# Altium PCB PCB1.PcbDoc
Units mm, origin at the board's own origin, x right, y up, seen from the top; angles counter-clockwise.
Board outline 152.65 x 102.36 mm, 2 copper layers (Top Layer, Bottom Layer); 71 components, 73 nets, 334 pads, 40 vias.
Unrouted connection lines stored in the file: 5.
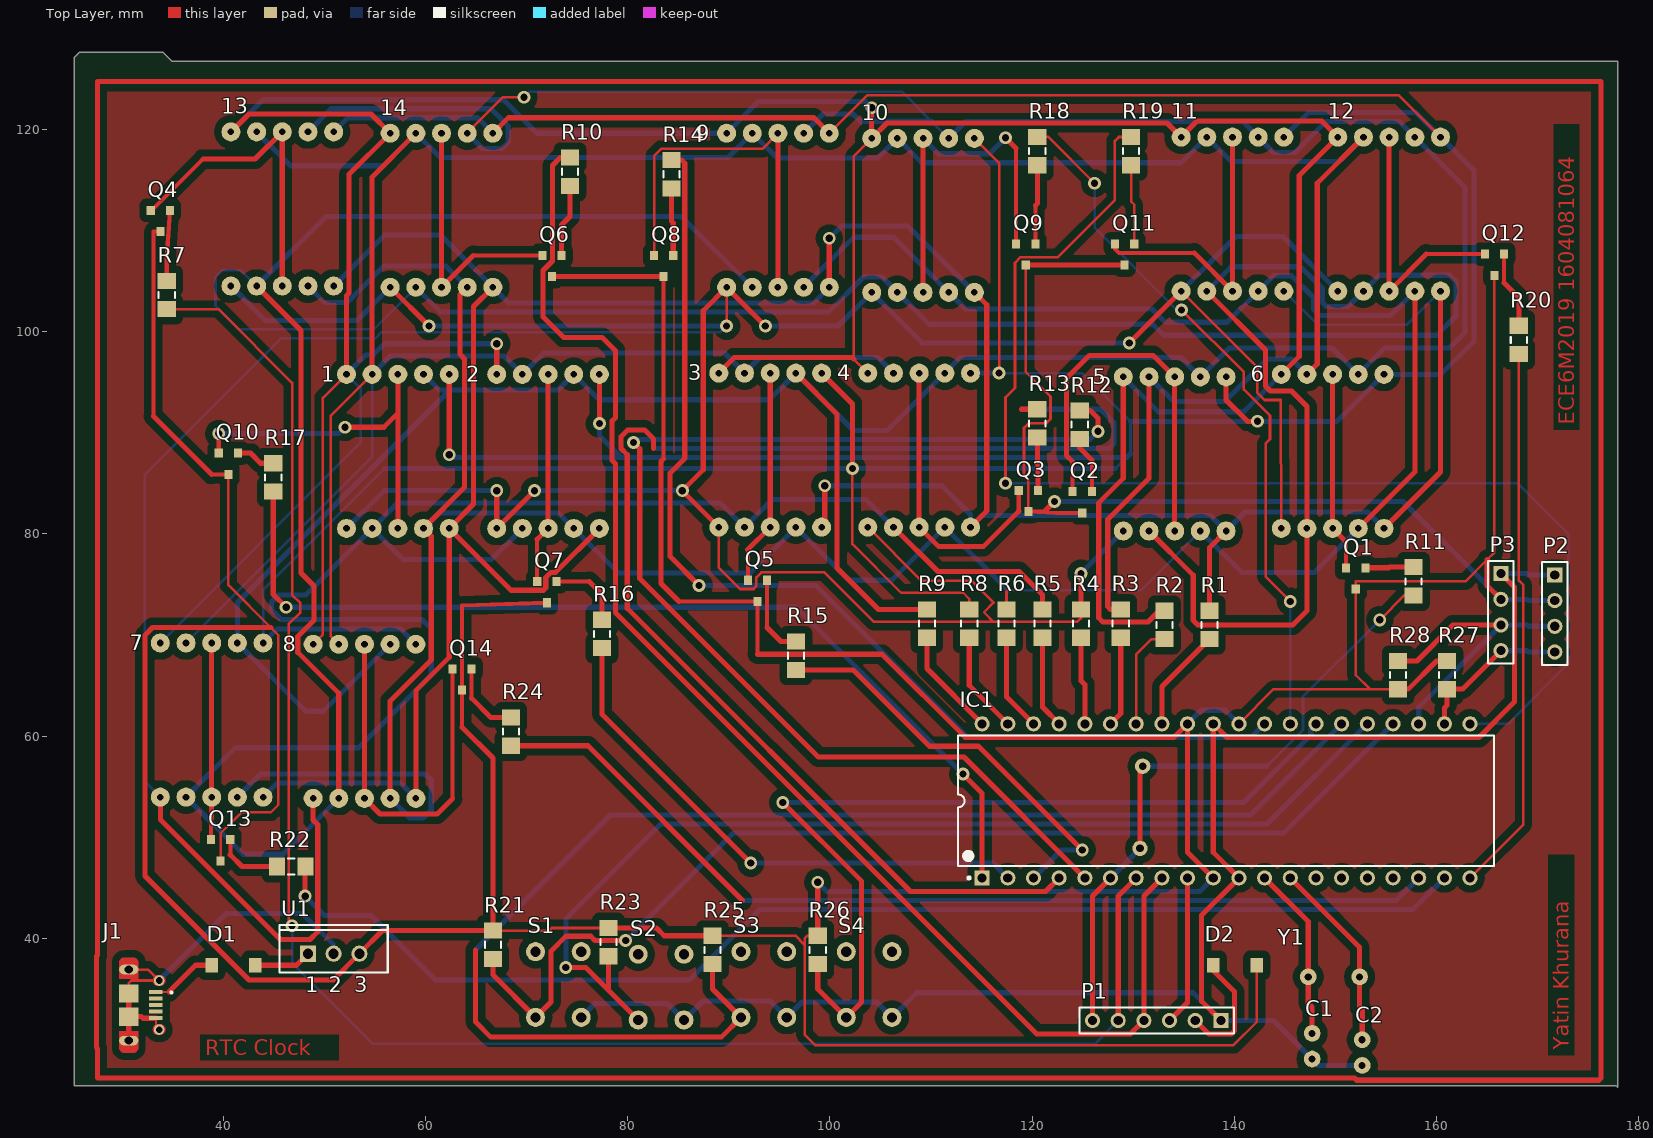
[diagram p0: Top Layer view]
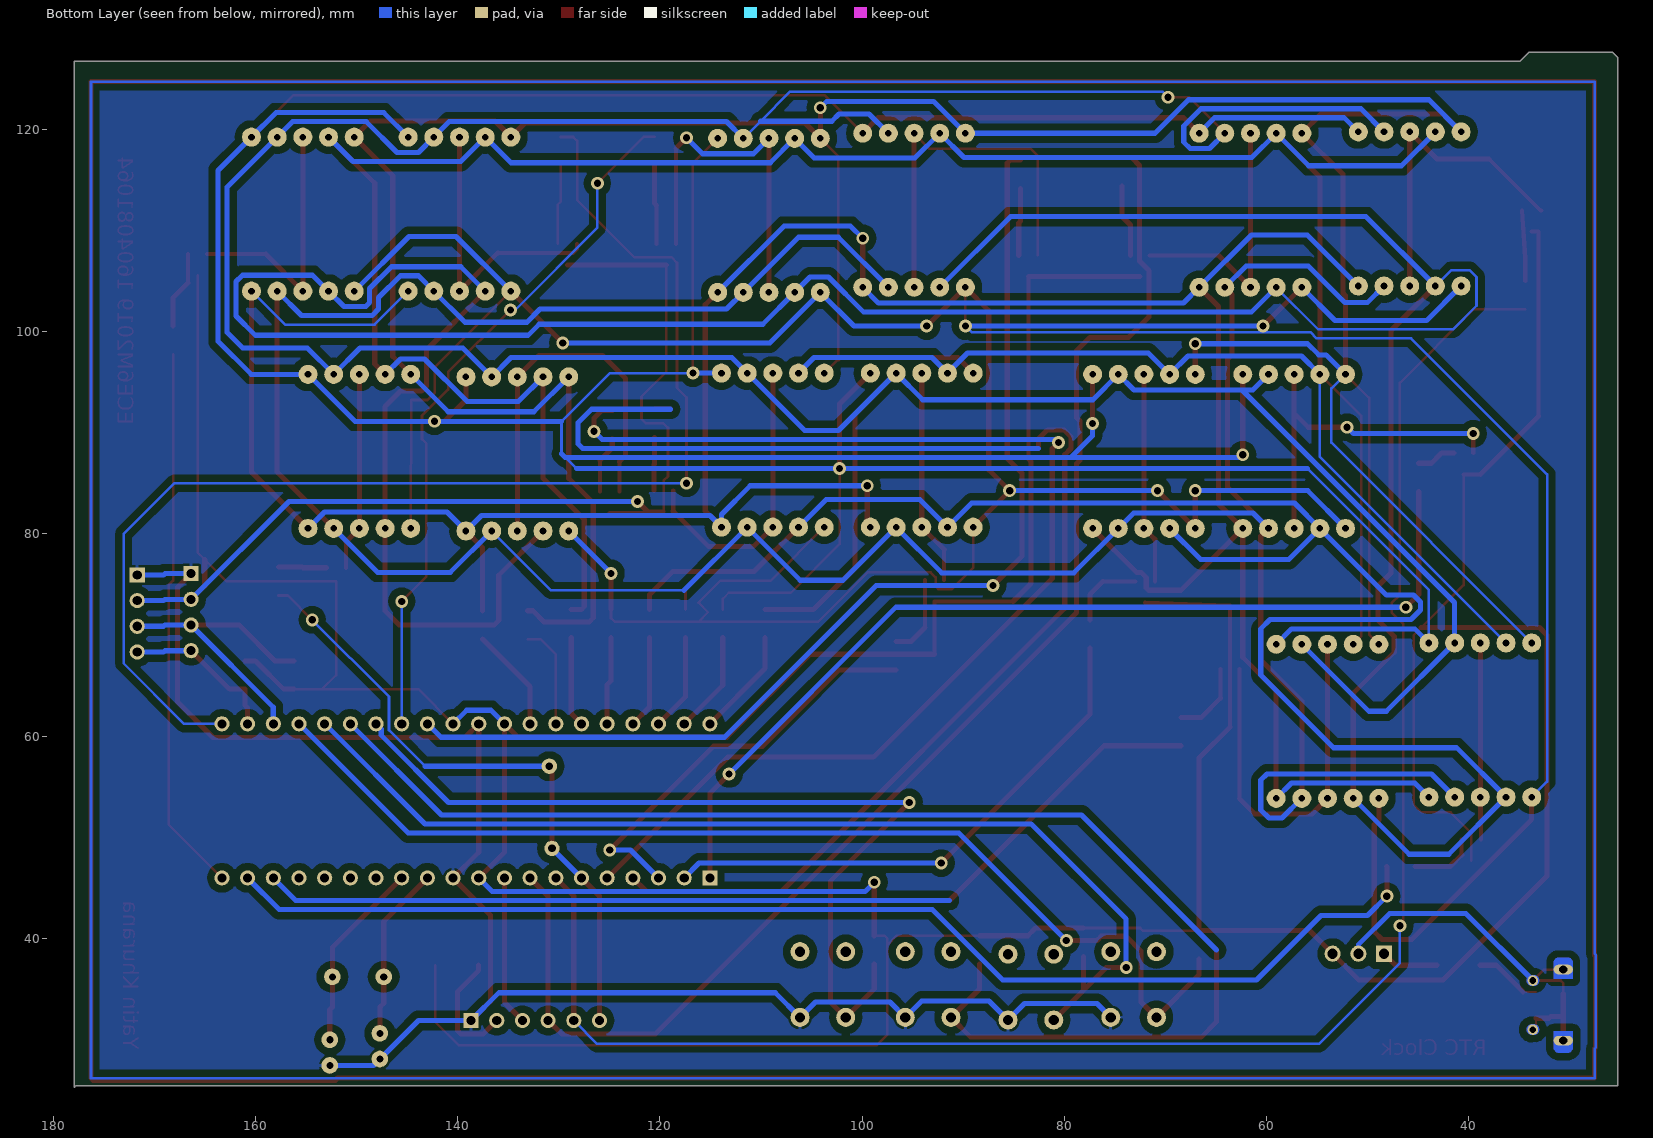
[diagram p1: Bottom Layer view, seen from below]

## Layer stack, top to bottom
Top Solder: solder mask 0.0102, Solder Resist, Dk 3.5
Top Layer: signal copper 0.0356
Dielectric 1: dielectric 0.32, FR-4, Dk 4.8
Bottom Layer: signal copper 0.0356
Bottom Solder: solder mask 0.0102, Solder Resist, Dk 3.5

## Board outline
25.273,127.127 25.273,25.4 177.8,25.4 177.927,25.273 177.927,126.746 34.925,126.746 34.036,127.635 25.781,127.635

## Design rules (kind name [scope] priority, off if disabled: settings)
Clearance [All] p1: gap=0.735 ignorepadtopadclearanceinfootprint=TRUE except(0: Arc-Hole Track-Hole SMDPad-Hole THPad-Hole Via-Hole Fill-Hole Poly-Hole Region-Hole Text-Hole; 0.025: Text-Text; 0.152: Arc-SMDPad Track-SMDPad; 0.254: Arc-Text Track-Text SMDPad-SMDPad SMDPad-THPad SMDPad-Via SMDPad-Text THPad-THPad THPad-Via THPad-Text Via-Via Via-Text Fill-Text Poly-Text Region-Text; 0.33: Arc-THPad Arc-Via Track-THPad Track-Via; 0.381: Arc-Arc Arc-Track Track-Track)
HoleSize [All] p1: absolutevalues=TRUE maxlimit=1 minlimit=0.7 maxpercent=80.000 minpercent=20.000
PolygonConnect [All] p1: connectstyle=Relief reliefconductorwidth=0.254 reliefentries=4 polygonreliefangle="90 Angle" airgapwidth=0.254
RoomDefinition RTC [InComponentClass('RTC')] p1: confinementstyle=ConfineIn formatcopy=TRUE lockcomponents=FALSE outline 27.555,26.311 176.272,26.311 176.272,124.863 27.555,124.863
RoutingVias [All] p1: holewidth=0.711 width=1.27 viastyle="Through Hole" minholewidth=0.711 minwidth=1.27 maxholewidth=0.711 maxwidth=1.27
SMDEntry [All] p1: side=TRUE corner=TRUE anyangle=FALSE
SMDNeckDown [All] p1: percent=50.000
SMDToCorner [All] p1: distance=10000
SMDToPlane [All] p1: distance=0
SolderMaskExpansion [All] p1: expansion=0.102
Width [All] p1: maxlimit=0.762 minlimit=0.127 preferedwidth=0.508
29 further rules are at their usual default settings.

## Components (designator, comment, footprint, x,y, rotation, side; value= is the part's Value field where it differs from the comment)
1 "7-SEGMENT-DISPLAYPTH" 7-SEGMENT-DISPLAY 57.273,88.16 r0 top
2 "7-SEGMENT-DISPLAYPTH" 7-SEGMENT-DISPLAY 72.132,88.16 r0 top
3 "7-SEGMENT-DISPLAYPTH" 7-SEGMENT-DISPLAY 94.103,88.287 r0 top
4 "7-SEGMENT-DISPLAYPTH" 7-SEGMENT-DISPLAY 108.835,88.287 r0 top
5 "7-SEGMENT-DISPLAYPTH" 7-SEGMENT-DISPLAY 134.108,87.906 r0 top
6 "7-SEGMENT-DISPLAYPTH" 7-SEGMENT-DISPLAY 149.729,88.16 r0 top
7 "7-SEGMENT-DISPLAYPTH" 7-SEGMENT-DISPLAY 38.862,61.592 r0 top
8 "7-SEGMENT-DISPLAYPTH" 7-SEGMENT-DISPLAY 53.975,61.465 r0 top
9 "7-SEGMENT-DISPLAYPTH" 7-SEGMENT-DISPLAY 94.869,112.011 r0 top
10 "7-SEGMENT-DISPLAYPTH" 7-SEGMENT-DISPLAY 109.22,111.503 r0 top
11 "7-SEGMENT-DISPLAYPTH" 7-SEGMENT-DISPLAY 139.827,111.63 r0 top
12 "7-SEGMENT-DISPLAYPTH" 7-SEGMENT-DISPLAY 155.321,111.63 r0 top
13 "7-SEGMENT-DISPLAYPTH" 7-SEGMENT-DISPLAY 45.847,112.138 r0 top
14 "7-SEGMENT-DISPLAYPTH" 7-SEGMENT-DISPLAY 61.595,112.011 r0 top
C1 "22PF-PTH-2.54MM-200V-5%" CAP-PTH-2.54 147.701,29.334 r90 top
C2 "22PF-PTH-2.54MM-200V-5%" CAP-PTH-2.54 152.654,28.699 r90 top
D1 "Schottky diode    A Schottky diode is a semiconductor diode which has a low forward voltage drop and a very fast switching action." SMA-DIODE 41.021,37.335 r0 top
D2 "Schottky diode    A Schottky diode is a semiconductor diode which has a low forward voltage drop and a very fast switching action." SMA-DIODE 140.081,37.335 r180 top
IC1 "MEGA32-P" 40P6 139.192,53.597 r90 top
J1 "SMD+DIP Micro USB; MICRO-B-SMD" HRS_ZX62D-B-5P8 30.734,33.401 r270 top
P1 "Programming Port" HDR1X6 138.684,31.874 r180 top
P2 "I2C" HDR1X4 171.704,75.943 r270 top
P3 "I2C" HDR1X4 166.37,76.07 r270 top
Q1 "NPN transistor    Current controlled devices typically used to amplify current or used as a switch.         BC547 -     COM-08928    (TO-92 45V 100mA) (1.Collector 2.Base 3.Emitter)             2N3904 -     COM-00521    (TO-92 40V 200mA) (1.Emitter 2.Base 3.Collector)             P2N2222A -     COM-12852    (TO-92 40V 600mA) (1.Collector 2.Base 3.Emitter)" SOT23-3 152.019,75.646 r180 top
Q2 "NPN transistor    Current controlled devices typically used to amplify current or used as a switch.         BC547 -     COM-08928    (TO-92 45V 100mA) (1.Collector 2.Base 3.Emitter)             2N3904 -     COM-00521    (TO-92 40V 200mA) (1.Emitter 2.Base 3.Collector)             P2N2222A -     COM-12852    (TO-92 40V 600mA) (1.Collector 2.Base 3.Emitter)" SOT23-3 124.968,83.182 r180 top
Q3 "NPN transistor    Current controlled devices typically used to amplify current or used as a switch.         BC547 -     COM-08928    (TO-92 45V 100mA) (1.Collector 2.Base 3.Emitter)             2N3904 -     COM-00521    (TO-92 40V 200mA) (1.Emitter 2.Base 3.Collector)             P2N2222A -     COM-12852    (TO-92 40V 600mA) (1.Collector 2.Base 3.Emitter)" SOT23-3 119.634,83.309 r180 top
Q4 "NPN transistor    Current controlled devices typically used to amplify current or used as a switch.         BC547 -     COM-08928    (TO-92 45V 100mA) (1.Collector 2.Base 3.Emitter)             2N3904 -     COM-00521    (TO-92 40V 200mA) (1.Emitter 2.Base 3.Collector)             P2N2222A -     COM-12852    (TO-92 40V 600mA) (1.Collector 2.Base 3.Emitter)" SOT23-3 33.782,110.995 r180 top
Q5 "NPN transistor    Current controlled devices typically used to amplify current or used as a switch.         BC547 -     COM-08928    (TO-92 45V 100mA) (1.Collector 2.Base 3.Emitter)             2N3904 -     COM-00521    (TO-92 40V 200mA) (1.Emitter 2.Base 3.Collector)             P2N2222A -     COM-12852    (TO-92 40V 600mA) (1.Collector 2.Base 3.Emitter)" SOT23-3 92.837,74.419 r180 top
Q6 "NPN transistor    Current controlled devices typically used to amplify current or used as a switch.         BC547 -     COM-08928    (TO-92 45V 100mA) (1.Collector 2.Base 3.Emitter)             2N3904 -     COM-00521    (TO-92 40V 200mA) (1.Emitter 2.Base 3.Collector)             P2N2222A -     COM-12852    (TO-92 40V 600mA) (1.Collector 2.Base 3.Emitter)" SOT23-3 72.517,106.55 r180 top
Q7 "NPN transistor    Current controlled devices typically used to amplify current or used as a switch.         BC547 -     COM-08928    (TO-92 45V 100mA) (1.Collector 2.Base 3.Emitter)             2N3904 -     COM-00521    (TO-92 40V 200mA) (1.Emitter 2.Base 3.Collector)             P2N2222A -     COM-12852    (TO-92 40V 600mA) (1.Collector 2.Base 3.Emitter)" SOT23-3 72.009,74.292 r180 top
Q8 "NPN transistor    Current controlled devices typically used to amplify current or used as a switch.         BC547 -     COM-08928    (TO-92 45V 100mA) (1.Collector 2.Base 3.Emitter)             2N3904 -     COM-00521    (TO-92 40V 200mA) (1.Emitter 2.Base 3.Collector)             P2N2222A -     COM-12852    (TO-92 40V 600mA) (1.Collector 2.Base 3.Emitter)" SOT23-3 83.566,106.55 r180 top
Q9 "NPN transistor    Current controlled devices typically used to amplify current or used as a switch.         BC547 -     COM-08928    (TO-92 45V 100mA) (1.Collector 2.Base 3.Emitter)             2N3904 -     COM-00521    (TO-92 40V 200mA) (1.Emitter 2.Base 3.Collector)             P2N2222A -     COM-12852    (TO-92 40V 600mA) (1.Collector 2.Base 3.Emitter)" SOT23-3 119.38,107.693 r180 top
Q10 "NPN transistor    Current controlled devices typically used to amplify current or used as a switch.         BC547 -     COM-08928    (TO-92 45V 100mA) (1.Collector 2.Base 3.Emitter)             2N3904 -     COM-00521    (TO-92 40V 200mA) (1.Emitter 2.Base 3.Collector)             P2N2222A -     COM-12852    (TO-92 40V 600mA) (1.Collector 2.Base 3.Emitter)" SOT23-3 40.513,86.992 r180 top
Q11 "NPN transistor    Current controlled devices typically used to amplify current or used as a switch.         BC547 -     COM-08928    (TO-92 45V 100mA) (1.Collector 2.Base 3.Emitter)             2N3904 -     COM-00521    (TO-92 40V 200mA) (1.Emitter 2.Base 3.Collector)             P2N2222A -     COM-12852    (TO-92 40V 600mA) (1.Collector 2.Base 3.Emitter)" SOT23-3 129.159,107.693 r180 top
Q12 "NPN transistor    Current controlled devices typically used to amplify current or used as a switch.         BC547 -     COM-08928    (TO-92 45V 100mA) (1.Collector 2.Base 3.Emitter)             2N3904 -     COM-00521    (TO-92 40V 200mA) (1.Emitter 2.Base 3.Collector)             P2N2222A -     COM-12852    (TO-92 40V 600mA) (1.Collector 2.Base 3.Emitter)" SOT23-3 165.735,106.677 r180 top
Q13 "NPN transistor    Current controlled devices typically used to amplify current or used as a switch.         BC547 -     COM-08928    (TO-92 45V 100mA) (1.Collector 2.Base 3.Emitter)             2N3904 -     COM-00521    (TO-92 40V 200mA) (1.Emitter 2.Base 3.Collector)             P2N2222A -     COM-12852    (TO-92 40V 600mA) (1.Collector 2.Base 3.Emitter)" SOT23-3 39.751,48.765 r180 top
Q14 "NPN transistor    Current controlled devices typically used to amplify current or used as a switch.         BC547 -     COM-08928    (TO-92 45V 100mA) (1.Collector 2.Base 3.Emitter)             2N3904 -     COM-00521    (TO-92 40V 200mA) (1.Emitter 2.Base 3.Collector)             P2N2222A -     COM-12852    (TO-92 40V 600mA) (1.Collector 2.Base 3.Emitter)" SOT23-3 63.627,65.656 r180 top
R1 "" 8-1206 137.541,70.996 r90 top
R2 "" 8-1206 133.096,70.996 r90 top
R3 "" 8-1206 128.778,71.123 r90 top
R4 "" 8-1206 124.841,71.123 r90 top
R5 "" 8-1206 121.031,71.123 r90 top
R6 "" 8-1206 117.475,71.123 r90 top
R7 "" 8-1206 34.417,103.629 r90 top
R8 "" 8-1206 113.792,71.123 r90 top
R9 "" 8-1206 109.601,71.123 r90 top
R10 "" 8-1206 74.295,115.818 r270 top
R11 "" 8-1206 157.734,75.311 r90 top
R12 "" 8-1206 124.714,90.802 r270 top
R13 "" 8-1206 120.523,90.929 r270 top
R14 "" 8-1206 84.328,115.57 r270 top
R15 "" 8-1206 96.647,67.951 r90 top
R16 "" 8-1206 77.47,70.101 r90 top
R17 "" 8-1206 44.958,85.595 r90 top
R18 "" 8-1206 120.523,117.862 r270 top
R19 "" 8-1206 129.794,117.859 r270 top
R20 "" 8-1206 168.148,99.19 r90 top
R21 "" 8-1206 66.675,39.367 r90 top
R22 "" 8-1206 46.736,47.114 r180 top
R23 "" 8-1206 78.105,39.621 r90 top
R24 "" 8-1206 68.453,60.446 r90 top
R25 "" 8-1206 88.392,38.859 r90 top
R26 "" 8-1206 98.806,38.859 r90 top
R27 "ERJP08J" 8-1206 161.036,66.043 r270 top
R28 "ERJP08J" 8-1206 156.21,66.043 r90 top
S1 "MOMENTARY-SWITCH-SPST-PTH-6.0MM-KIT" TACTILE_SWITCH_PTH_6.0MM_KIT 73.152,35.43 r90 top
S2 "MOMENTARY-SWITCH-SPST-PTH-6.0MM-KIT" TACTILE_SWITCH_PTH_6.0MM_KIT 83.312,35.176 r90 top
S3 "MOMENTARY-SWITCH-SPST-PTH-6.0MM-KIT" TACTILE_SWITCH_PTH_6.0MM_KIT 93.472,35.43 r90 top
S4 "MOMENTARY-SWITCH-SPST-PTH-6.0MM-KIT" TACTILE_SWITCH_PTH_6.0MM_KIT 103.886,35.43 r90 top
U1 "µA7805CKC" KC03 50.927,38.478 r0 top
Y1 "CRYSTAL-16MHZPTH-HC49US" HC49US 149.86,36.192 r180 top

## Footprints (in the part's own frame and the unit in brackets; to place one, negate y for a bottom-side part, rotate by r counter-clockwise, add the part's x,y. Pads: shape width x height; smd on the part's side, far side on the other; paste and mask are expansions set on the pad)
7-SEGMENT-DISPLAY [mil]
  round 74 hole 25.59: 1(-200,-300) 2(-100,-300) 3(0,-300) 4(100,-300) 5(200,-300) 6(200,300) 7(100,300) 8(0,300) 9(-100,300) 10(-200,300)
8-1206 [mm] "Chip Resistor; Body 3.1 x 1.6 mm (LxW typ)"
  rect 1.6x1.8 smd: 1(-1.4,0) 2(1.4,0)
  silkscreen extent -0.3,-0.8 0.3,0.8
40P6 [mm] "DIP, 40-Leads, Row Spacing 15.24mm, Pitch 2.54mm, Body 52.2x13.95mm"
  rect 1.5x1.5 hole 0.9: 1(-7.62,24.13)
  round 1.5 hole 0.9: 2(-7.62,21.59) 3(-7.62,19.05) 4(-7.62,16.51) 5(-7.62,13.97) 6(-7.62,11.43) 7(-7.62,8.89) 8(-7.62,6.35) 9(-7.62,3.81) 10(-7.62,1.27) 11(-7.62,-1.27) 12(-7.62,-3.81) 13(-7.62,-6.35) 14(-7.62,-8.89) 15(-7.62,-11.43) 16(-7.62,-13.97) 17(-7.62,-16.51) 18(-7.62,-19.05) 19(-7.62,-21.59) 20(-7.62,-24.13) 21(7.62,-24.13) 22(7.62,-21.59) 23(7.62,-19.05) 24(7.62,-16.51) 25(7.62,-13.97) 26(7.62,-11.43) 27(7.62,-8.89) 28(7.62,-6.35) 29(7.62,-3.81) 30(7.62,-1.27) 31(7.62,1.27) 32(7.62,3.81) 33(7.62,6.35) 34(7.62,8.89) 35(7.62,11.43) 36(7.62,13.97) 37(7.62,16.51) 38(7.62,19.05) 39(7.62,21.59) 40(7.62,24.13)
  silkscreen extent -7.74,-26.5 6.45,26.5, body extent -7.05,-26.47 7.05,26.47, height 4.83
CAP-PTH-2.54 [mil]
  round 65 hole 27.56: 1(-50,0) 2(50,0)
HC49US [mil]
  round 65 hole 27.56: 1(-100,0) 2(100,0)
HDR1X4 [mm] "Connector; Header; 4 Position"
  rect 1.5x1.5 hole 0.9: 1(0,0)
  round 1.5 hole 0.9: 2(2.54,0) 3(5.08,0) 4(7.62,0)
  silkscreen extent -1.27,-1.27 8.89,1.27
HDR1X6 [mm] "Connector; Header; 6 Position"
  rect 1.5x1.5 hole 0.9: 1(0,0)
  round 1.5 hole 0.9: 2(2.54,0) 3(5.08,0) 4(7.62,0) 5(10.16,0) 6(12.7,0)
  silkscreen extent -1.27,-1.27 13.97,1.27
HRS_ZX62D-B-5P8 [mm]
  rect 0.4x1.35 smd: 1(-1.3,2.6) 2(-0.65,2.6) 3(0,2.6) 4(0.65,2.6) 5(1.3,2.6)
  oval 0.95x1.9 hole 0.825: S(-3.513,-0.075) S(3.513,-0.075)
  round 1.05 hole 0.65: S(-2.425,2.925) S(2.425,2.925)
  rect 1.8x1.9 smd: S(-1.15,-0.075) S(1.15,-0.075)
  Top Layer region: -2.425,3.35 -2.425,3.55 -2.224,3.51 -2.054,3.396 -1.94,3.226 -1.9,3.025 -1.9,3.025 -1.9,2.825 -1.94,2.624 -2.054,2.454 -2.224,2.34 -2.425,2.3 -2.425,2.3 -2.425,2.5 -2.301,2.525 -2.195,2.595 -2.125,2.701 -2.1,2.825 -2.1,2.825 -2.1,3.025 -2.144,3.187 -2.262,3.306 -2.425,3.35
  Top Layer region: -2.425,2.5 -2.425,2.3 -2.626,2.34 -2.796,2.454 -2.91,2.624 -2.95,2.825 -2.95,2.825 -2.95,3.025 -2.91,3.226 -2.796,3.396 -2.626,3.51 -2.425,3.55 -2.425,3.55 -2.425,3.35 -2.549,3.325 -2.655,3.255 -2.725,3.149 -2.75,3.025 -2.75,3.025 -2.75,2.825 -2.706,2.663 -2.587,2.544 -2.425,2.5
  Top Layer region: 2.425,3.35 2.425,3.55 2.626,3.51 2.796,3.396 2.91,3.226 2.95,3.025 2.95,3.025 2.95,2.825 2.91,2.624 2.796,2.454 2.626,2.34 2.425,2.3 2.425,2.3 2.425,2.5 2.549,2.525 2.655,2.595 2.725,2.701 2.75,2.825 2.75,2.825 2.75,3.025 2.725,3.149 2.655,3.255 2.549,3.325 2.425,3.35
  Top Layer region: 2.425,2.5 2.425,2.3 2.224,2.34 2.054,2.454 1.94,2.624 1.9,2.825 1.9,2.825 1.9,3.025 1.94,3.226 2.054,3.396 2.224,3.51 2.425,3.55 2.425,3.55 2.425,3.35 2.262,3.306 2.144,3.187 2.1,3.025 2.1,3.025 2.1,2.825 2.125,2.701 2.195,2.595 2.301,2.525 2.425,2.5
  Top Layer region: -2.6,0.875 -4.2,0.875 -4.391,0.837 -4.554,0.729 -4.662,0.566 -4.7,0.375 -4.7,0.375 -4.7,-0.075 -3.925,-0.075 -3.925,0.375 -3.902,0.49 -3.837,0.587 -3.74,0.652 -3.625,0.675 -3.625,0.675 -3.4,0.675 -3.285,0.652 -3.188,0.587 -3.123,0.49 -3.1,0.375 -3.1,0.375 -3.1,-0.075 -2.6,-0.075
  Top Layer region: 2.6,-1.025 4.2,-1.025 4.391,-0.987 4.553,-0.879 4.662,-0.716 4.7,-0.525 4.7,-0.525 4.7,-0.075 3.925,-0.075 3.925,-0.525 3.902,-0.64 3.837,-0.737 3.74,-0.802 3.625,-0.825 3.625,-0.825 3.4,-0.825 3.285,-0.802 3.188,-0.737 3.123,-0.64 3.1,-0.525 3.1,-0.525 3.1,-0.075 2.6,-0.075
  Top Layer region: -3.1,-0.075 -2.6,-0.075 -2.6,-1.025 -4.2,-1.025 -4.391,-0.987 -4.553,-0.879 -4.662,-0.716 -4.7,-0.525 -4.7,-0.525 -4.7,-0.075 -3.925,-0.075 -3.925,-0.55 -3.904,-0.655 -3.844,-0.744 -3.755,-0.804 -3.65,-0.825 -3.65,-0.825 -3.4,-0.825 -3.285,-0.802 -3.188,-0.737 -3.123,-0.64 -3.1,-0.525 -3.1,-0.525
  Top Layer region: 3.1,-0.075 2.6,-0.075 2.6,0.875 4.2,0.875 4.391,0.837 4.554,0.729 4.662,0.566 4.7,0.375 4.7,0.375 4.7,-0.075 3.925,-0.075 3.925,0.4 3.904,0.505 3.844,0.594 3.755,0.654 3.65,0.675 3.65,0.675 3.4,0.675 3.285,0.652 3.188,0.587 3.123,0.49 3.1,0.375 3.1,0.375
  Bottom Layer region: -2.425,3.35 -2.425,3.55 -2.224,3.51 -2.054,3.396 -1.94,3.226 -1.9,3.025 -1.9,3.025 -1.9,2.825 -1.94,2.624 -2.054,2.454 -2.224,2.34 -2.425,2.3 -2.425,2.3 -2.425,2.5 -2.301,2.525 -2.195,2.595 -2.125,2.701 -2.1,2.825 -2.1,2.825 -2.1,3.025 -2.144,3.187 -2.262,3.306 -2.425,3.35
  Bottom Layer region: -2.425,2.5 -2.425,2.3 -2.626,2.34 -2.796,2.454 -2.91,2.624 -2.95,2.825 -2.95,2.825 -2.95,3.025 -2.91,3.226 -2.796,3.396 -2.626,3.51 -2.425,3.55 -2.425,3.55 -2.425,3.35 -2.549,3.325 -2.655,3.255 -2.725,3.149 -2.75,3.025 -2.75,3.025 -2.75,2.825 -2.706,2.663 -2.587,2.544 -2.425,2.5
  Bottom Layer region: 2.425,3.35 2.425,3.55 2.626,3.51 2.796,3.396 2.91,3.226 2.95,3.025 2.95,3.025 2.95,2.825 2.91,2.624 2.796,2.454 2.626,2.34 2.425,2.3 2.425,2.3 2.425,2.5 2.549,2.525 2.655,2.595 2.725,2.701 2.75,2.825 2.75,2.825 2.75,3.025 2.725,3.149 2.655,3.255 2.549,3.325 2.425,3.35
  Bottom Layer region: 2.425,2.5 2.425,2.3 2.224,2.34 2.054,2.454 1.94,2.624 1.9,2.825 1.9,2.825 1.9,3.025 1.94,3.226 2.054,3.396 2.224,3.51 2.425,3.55 2.425,3.55 2.425,3.35 2.262,3.306 2.144,3.187 2.1,3.025 2.1,3.025 2.1,2.825 2.125,2.701 2.195,2.595 2.301,2.525 2.425,2.5
  Bottom Layer region: -2.6,0.875 -4.2,0.875 -4.391,0.837 -4.554,0.729 -4.662,0.566 -4.7,0.375 -4.7,0.375 -4.7,-0.075 -3.925,-0.075 -3.925,0.375 -3.902,0.49 -3.837,0.587 -3.74,0.652 -3.625,0.675 -3.625,0.675 -3.4,0.675 -3.285,0.652 -3.188,0.587 -3.123,0.49 -3.1,0.375 -3.1,0.375 -3.1,-0.075 -2.6,-0.075
  Bottom Layer region: 2.6,-1.025 4.2,-1.025 4.391,-0.987 4.553,-0.879 4.662,-0.716 4.7,-0.525 4.7,-0.525 4.7,-0.075 3.925,-0.075 3.925,-0.525 3.902,-0.64 3.837,-0.737 3.74,-0.802 3.625,-0.825 3.625,-0.825 3.4,-0.825 3.285,-0.802 3.188,-0.737 3.123,-0.64 3.1,-0.525 3.1,-0.525 3.1,-0.075 2.6,-0.075
  Bottom Layer region: -3.1,-0.075 -2.6,-0.075 -2.6,-1.025 -4.2,-1.025 -4.391,-0.987 -4.553,-0.879 -4.662,-0.716 -4.7,-0.525 -4.7,-0.525 -4.7,-0.075 -3.925,-0.075 -3.925,-0.55 -3.904,-0.655 -3.844,-0.744 -3.755,-0.804 -3.65,-0.825 -3.65,-0.825 -3.4,-0.825 -3.285,-0.802 -3.188,-0.737 -3.123,-0.64 -3.1,-0.525 -3.1,-0.525
  Bottom Layer region: 3.1,-0.075 2.6,-0.075 2.6,0.875 4.2,0.875 4.391,0.837 4.554,0.729 4.662,0.566 4.7,0.375 4.7,0.375 4.7,-0.075 3.925,-0.075 3.925,0.4 3.904,0.505 3.844,0.594 3.755,0.654 3.65,0.675 3.65,0.675 3.4,0.675 3.285,0.652 3.188,0.587 3.123,0.49 3.1,0.375 3.1,0.375
  Mechanical 10 keep-out region: -3.75,0.875 3.75,0.875 3.75,1.925 -3.75,1.925
  Mechanical 10 keep-out region: -3.75,-1.525 3.75,-1.525 3.75,-1.025 -3.75,-1.025
  Mechanical 10 keep-out region: -2.6,-1.025 -2.05,-1.025 -2.05,0.875 -2.6,0.875
  Mechanical 10 keep-out region: -0.25,-1.025 0.25,-1.025 0.25,0.875 -0.25,0.875
  Mechanical 10 keep-out region: 2.05,-1.025 2.6,-1.025 2.6,0.875 2.05,0.875
  silkscreen extent -1.35,4.04 -1.15,4.24
KC03 [mm] "TO, Thru-Hole, Vertical, Heatsink Mounted; 3 In-Line Leads; Pitch 2.54 mm"
  rect 1.6x1.6 hole 1: 1(-2.54,0)
  round 1.6 hole 1: 2(0,0) 3(2.54,0)
  silkscreen extent -5.35,-1.85 5.35,2.85
SMA-DIODE [mm]
  rect 1.27x1.47 smd: A(-2.15,0) C(2.15,0)
SOT23-3 [mil]
  rect 31.5x35.43 smd: 1(-37.4,-39.37) 2(37.4,-39.37) 3(0,43.31)
TACTILE_SWITCH_PTH_6.0MM_KIT [mil]
  round 74 hole 40: 1(-128,89) 2(128,89) 3(-128,-89) 4(128,-89)

## Part data
D1 D2: library part DIODE-SCHOTTKY-SS14, PROD_ID=DIO-08053
IC1: "MICROCONTROLLER   32 Kbytes FLASH 2 Kbytes SRAM 1 Kbytes EEPROM USART 8-channel 10 bit ADC Source: www.atmel.com .. doc2503.pdf", MPN=ATMEGA32-16PU, OC_FARNELL=1661729, OC_NEWARK=51P1794
J1: library part ZX62D-B-5P8, Package=None, Availability=Unavailable, MF=Hirose, MP=ZX62D-B-5P8, Price=None
P1: library part "Header 6", "Header, 6-Pin", LatestRevisionDate=17-Jul-2002, LatestRevisionNote="Re-released for DXP Platform.", Publisher="Altium Limited"
P2 P3: library part "Header 4", "Header, 4-Pin", LatestRevisionDate=17-Jul-2002, LatestRevisionNote="Re-released for DXP Platform.", Publisher="Altium Limited"
Q1 Q2 Q3 Q4 Q5 Q6 Q7 Q8 Q9 Q10 Q11 Q12 Q13 Q14: library part TRANS_NPN-MMBT2222AL, PROD_ID=TRANS-08049
R1 R2 R3 R4 R5 R6 R7 R8 R9 R10 R11 R12 R13 R14 R15 R16 R17 R18 R19 R20 R21 R22 R23 R24 R25 R26: library part ERJP08J, "Anti-Surge Thick Film Chip Resistor, 10 Ohm to 1M Ohm Range, 5% Tolerance, 1206 Size, 0.25 W", PackageDocument=Mar-2003, Code_IPC="3216 [1206]", ComponentLink1Description="Manufacturer Link", ComponentLink1URL=http://www.panasonic.com/industrial/components/resistive_products.htm, ComponentLink2Description=Datasheet, ComponentLink2URL=http://www.panasonic.com/industrial/components/pdf/AOA0000CE4.pdf, LatestRevisionDate=19-Mar-2004, LatestRevisionNote="Silkscreen size reduced.", Note="If flow soldering, adjust pad width of PCB Footprint to 0.7 - 0.8 times the width of the resistor.", PackageReference=8-1206, Published=17-Dec-2003, Publisher="Altium Limited"
R27 R28: "Anti-Surge Thick Film Chip Resistor, 10 Ohm to 1M Ohm Range, 5% Tolerance, 1206 Size, 0.25 W", PackageDocument=Mar-2003, Code_IPC="3216 [1206]", ComponentLink1Description="Manufacturer Link", ComponentLink1URL=http://www.panasonic.com/industrial/components/resistive_products.htm, ComponentLink2Description=Datasheet, ComponentLink2URL=http://www.panasonic.com/industrial/components/pdf/AOA0000CE4.pdf, LatestRevisionDate=19-Mar-2004, LatestRevisionNote="Silkscreen size reduced.", Note="If flow soldering, adjust pad width of PCB Footprint to 0.7 - 0.8 times the width of the resistor.", PackageReference=8-1206, Published=17-Dec-2003, Publisher="Altium Limited"
U1: "Positive-Voltage Regulator", ComponentLink1Description="Manufacturer Link", ComponentLink1URL=http://www.ti.com/, ComponentLink2Description=Datasheet, ComponentLink2URL=http://www-s.ti.com/sc/ds/ua7805.pdf, DatasheetVersion=Jul-1999, Note="Pin 2 is electrically connected to TAB.", PackageDescription="TO, Thru-Hole, Vertical, Heatsink Mounted; 3 In-Line Leads; Pitch 2.54 mm", PackageReference=KC03, PackageVersion=Sep-1995, Published=15-Apr-2002, Publisher="Altium Limited"
C1 C2: PROD_ID=CAP-09128
S1 S2 S3 S4: PROD_ID=SWCH-08441, SF_SKU=COM-00097
Y1: PROD_ID=XTAL-08181, SF_ID=COM-00536

## Free pads (board coordinates)
  round 1.524 hole 0.762: 5(130.68,48.895) 6(130.937,57.023)

## Via types
v1: diameter 1.27, hole 0.711, Top Layer to Bottom Layer, 40 vias

## Nets (pads, with @x,y where several pads share a name; then routed paths per layer and width w, separated by ;. In a path a pad name is that pad's centre, name@x,y a point inside that pad or via, vN(x,y) a via of type N, cw(c..) or ccw(c..) an arc to the next point about the centre after c; other vN are vias at no path point)
+5V: D2.A IC1.10 IC1.30 IC1.32 P2.2 P3.2 Q1.3 Q2.3 Q3.3 Q4.3 Q5.3 Q6.3 Q7.3 Q8.3 Q9.3 Q10.3 Q11.3 Q12.3 Q13.3 Q14.3 R21.2 R23.2 R25.2 R26.2 R27.1 R28.1 U1.3 | length 638.2
  Top Layer w0.254: Q13.3 39.751,50.394 41.808,52.451 44.704,52.451 45.466,53.213 45.466,69.977 44.704,70.739 40.513,74.93 Q10.3 ; R21.2 72.263,40.767 72.517,41.021 R23.2 ; R25.2 96.596,40.259 97.511,39.345 ; R26.2 97.79,40.259 97.511,39.979 97.511,39.345 ; Q9.3 119.38,96.023 121.829,93.574 121.829,91.381 121.412,90.964 119.679,90.964 119.202,90.487 119.202,85.7 119.634,85.268 Q3.3 ; IC1.30 143.888,64.643 153.416,64.643 ; D2.A 142.231,31.75 139.92,29.439 98.552,29.439 97.511,30.48 97.511,39.345 ; R28.1 153.416,64.643 ; Q12.3 165.735,78.181 165.024,77.47 162.865,75.311 152.019,75.311 Q1.3 152.019,66.04 153.416,64.643
  Top Layer w0.4: 33.096,91.643 33.096,109.895 Q4.3 ; 38.848,85.892 Q10.3 ; 63.627,60.884 Q14.3 63.627,72.898 Q7.3 ; 83.566,87.431 Q8.3 ; 85.09,73.319 Q5.3 92.837,68.123 ; 121.223,82.209 Q3.3 122.352,82.082 Q2.3
  Top Layer w0.508: 33.096,91.643 38.848,85.892 ; 44.704,70.739 33.02,70.739 32.258,69.977 32.258,46.177 42.545,35.89 50.879,35.89 U1.3 55.756,40.767 R21.2 66.675,57.836 63.627,60.884 ; Q6.3 Q8.3 ; R23.2 82.855,41.021 83.617,40.259 R25.2 ; 83.566,87.431 83.305,87.171 83.305,75.104 85.09,73.319 ; 92.837,68.123 92.862,68.097 105.171,68.097 113.386,59.883 134.048,59.883 IC1.32 135.382,48.517 IC1.10 ; R26.2 v1(98.806,45.542) ; Q9.3 Q11.3 ; 121.223,82.209 v1(122.225,83.21) ; R28.1 157.201,64.643 160.001,67.443 R27.1 ; 165.024,77.47 165.024,74.876 P3.2
  Bottom Layer w0.508: v1(98.806,45.542) 99.705,44.643 136.588,44.643 IC1.10 ; v1(122.225,83.21) 156.69,83.21 P3.2 168.961,73.53 169.088,73.403 P2.2 ; IC1.32 136.725,62.56 139.119,62.56 IC1.30
GND: C1.1 C2.1 IC1.11 IC1.31 P1.1 P2.1 P3.1 S1.3 S2.3 S3.3 S4.3 | length 168.3
  Top Layer w0.508: P1.1 136.779,33.779 136.779,42.294 IC1.11 137.922,48.517 IC1.31 139.271,59.868 164.211,59.868 167.704,63.361 167.704,74.736 P3.1
  Bottom Layer w0.508: S1.3 76.787,33.553 83.944,33.553 S2.3 87.455,33.807 94.104,33.807 S3.3 97.26,33.706 104.62,33.706 S4.3 108.588,34.62 135.938,34.62 P1.1 143.891,31.874 C1.1 148.336,27.429 C2.1 ; P3.1 168.961,76.07 169.088,75.943 P2.1
Net1_1: 1.1 2.1 3.1 4.1 5.1 6.1 7.1 8.1 9.1 10.1 11.1 12.1 13.1 14.1 R4.2 | length 430.1
  Top Layer w0.254: 3.1 89.023,76.648 91.123,74.549 92.456,74.549 92.735,74.828 92.735,75.692 93.243,76.2 99.466,76.2 104.369,71.298 116.205,71.298 ; v1(89.789,100.559) 9.1 ; 4.1 109.035,75.387 114.021,75.387 116.205,73.203 115.252,72.25 116.205,71.298 ; R4.2 124.841,71.679 124.46,71.298 116.205,71.298 ; 11.1 142.263,96.494 142.263,93.98 143,93.243 144.591,93.243 6.1
  Top Layer w0.508: 7.1 33.782,51.74 45.644,39.878 48.59,39.878 49.352,40.64 49.352,51.257 48.895,51.714 8.1 ; 14.1 v1(60.347,100.559) ; v1(67.052,84.277) 2.1 v1(70.789,84.277) ; 3.1 v1(85.413,84.277) 87.478,86.341 87.478,102.08 9.1 v1(93.621,100.559) ; R4.2 v1(124.841,76.099) ; v1(129.619,98.882) 11.1
  Bottom Layer w0.254: 7.1 32.258,55.496 32.258,85.877 45.72,99.339 55.067,99.339 55.677,99.949 89.179,99.949 v1(89.789,100.559)
  Bottom Layer w0.508: 13.1 44.168,101.117 53.241,101.117 14.1 ; 1.1 55.93,84.277 v1(67.052,84.277) ; v1(60.347,100.559) v1(89.789,100.559) ; v1(70.789,84.277) v1(85.413,84.277) ; v1(93.621,100.559) 100.816,100.559 10.1 109.141,98.882 v1(129.619,98.882) ; v1(124.841,76.099) 5.1 ; 11.1 140.16,109.423 144.828,109.423 12.1
Net1_2: 1.2 2.2 3.2 4.2 5.2 6.2 7.2 8.2 9.2 10.2 11.2 12.2 13.2 14.2 R5.2 | length 517.8
  Top Layer w0.508: 13.2 47.701,100.124 47.701,76.124 48.971,74.854 48.971,71.45 47.371,69.85 47.371,68.301 51.435,64.237 8.2 ; 4.2 110.686,76.276 118.745,76.276 121.031,73.99 R5.2 ; 5.2 135.941,75.914 135.941,71.438 136.385,70.993 145.792,70.993 147.189,72.39 6.2 147.189,92.612 145.669,94.132 143.586,94.132 143.104,94.615 143.104,98.193 11.2
  Bottom Layer w0.254: 13.2 41.729,106.096 39.929,106.096 39.243,105.41 39.243,102.565 41.58,100.228 54.892,100.228 14.2
  Bottom Layer w0.508: 13.2 50.168,111.379 85.341,111.379 9.2 ; 8.2 45.901,48.311 41.983,48.311 7.2 41.202,58.852 53.391,58.852 60.579,66.04 60.579,70.612 59.665,71.526 45.72,71.526 44.767,72.479 44.767,73.266 45.466,73.965 48.158,73.965 1.2 ; 14.2 61.516,101.93 99.847,101.93 103.327,105.41 105.153,105.41 10.2 109.826,100.737 131.944,100.737 133.037,99.644 160.02,99.644 161.925,101.549 161.925,104.953 161.29,105.588 154.359,105.588 12.2 151.257,102.486 149.101,102.486 148.717,102.87 148.717,104.267 146.558,106.426 139.703,106.426 11.2 ; 2.2 66.522,77.47 57.804,77.47 1.2 ; 4.2 103.574,83.388 94.284,83.388 3.2 89.173,83.058 57.251,83.058 1.2
Net1_3: 1.3 1.8 Q10.2 | length 35.7
  Top Layer w0.4: Q10.2 v1(39.563,89.916)
  Top Layer w0.508: v1(52.045,90.551) 55.88,90.551 57.273,91.944 ; 1.3 57.273,91.944 ; 1.8 57.273,91.944
  Bottom Layer w0.508: v1(39.563,89.916) 51.41,89.916 v1(52.045,90.551)
Net1_4: 1.4 2.4 3.4 4.4 5.4 6.4 7.4 8.4 9.4 10.4 11.4 12.4 13.4 14.4 R6.2 | length 311.3
  Top Layer w0.254: R6.2 117.475,74.276 117.621,74.422
  Top Layer w0.508: 8.4 56.515,63.475 60.579,67.539 60.579,79.775 1.4 63.877,84.604 63.877,97.307 63.424,97.761 63.424,103.68 14.4 ; 6.4 157.861,86.132 12.4
  Bottom Layer w0.254: 117.621,74.422 130.784,74.422 5.4
  Bottom Layer w0.508: 7.4 43.691,56.261 59.969,56.261 60.579,55.651 60.579,52.705 59.766,51.892 58.468,51.892 8.4 ; 13.4 50.035,102.87 52.239,102.87 55.88,106.511 62.015,106.511 14.4 ; 1.4 61.34,82.067 73.145,82.067 2.4 79.063,76.149 92.125,76.149 3.4 101.898,75.413 106.121,75.413 4.4 117.621,74.422 ; 9.4 102.365,109.347 106.296,109.347 10.4 113.408,102.235 131.868,102.235 133.164,100.94 139.297,100.94 11.4 143.894,105.537 145.666,105.537 147.828,103.375 147.828,102.235 148.466,101.597 155.448,101.597 12.4 ; 5.4 140.735,76.2 147.929,76.2 6.4
Net1_5: 1.5 2.5 3.5 4.5 5.5 6.5 7.5 8.5 9.5 10.5 11.5 12.5 13.5 14.5 R1.2 | length 309
  Top Layer w0.508: 8.5 59.055,64.494 62.353,67.793 1.5 ; 14.5 64.766,102.482 64.766,82.953 1.5 ; 2.5 72.872,76.2 72.415,76.2 71.907,75.692 71.907,74.676 71.653,74.422 68.472,74.422 1.5 ; 3.5 99.492,80.976 v1(99.492,84.76) ; 9.5 v1(99.949,109.245) ; 4.5 115.519,82.271 115.519,102.664 10.5 ; R1.2 137.541,78.639 5.5 ; 6.5 160.401,86.132 12.5
  Bottom Layer w0.254: 11.5 148.226,100.691 157.082,100.691 12.5
  Bottom Layer w0.508: 7.5 45.342,55.372 57.528,55.372 8.5 ; 13.5 55.985,109.576 61.49,109.576 14.5 68.221,102.845 98.403,102.845 9.5 ; v1(99.492,84.76) 111.071,84.76 113.915,81.915 4.5 115.061,81.813 137.661,81.813 5.5 141.071,82.169 153.181,82.169 6.5 ; v1(99.949,109.245) 101.143,110.439 107.744,110.439 10.5
Net1_6: 1.6 2.6 3.6 4.6 5.6 6.6 7.6 8.6 9.6 10.6 11.6 12.6 13.6 14.6 R8.2 | length 473.2
  Top Layer w0.254: 9.6 103.686,123.368 156.283,123.368 12.6 ; v1(102.233,86.462) 102.233,78.996 107.048,74.181 113.195,74.181 113.792,73.584 R8.2 ; 10.6 116.738,116.685 v1(116.738,95.907)
  Top Layer w0.508: v1(62.353,87.833) 1.6 ; 14.6 68.202,121.158 98.422,121.158 9.6 ; v1(77.212,90.907) 2.6 ; 3.6 102.233,92.857 v1(102.233,86.462) ; 5.6 139.188,93.247 141.3,91.135 v1(142.309,91.135)
  Bottom Layer w0.254: 7.6 43.942,74.444 55.959,86.462 ; v1(116.738,95.907) 124.963,95.907 129.736,91.135 129.736,87.927 ; 128.27,86.462 129.362,87.554
  Bottom Layer w0.508: 7.6 45.342,70.612 57.528,70.612 8.6 ; 13.6 52.327,121.158 65.148,121.158 14.6 ; 55.959,86.462 v1(102.233,86.462) 128.27,86.462 ; v1(62.353,87.833) 62.633,87.554 79.368,87.554 ; v1(77.212,90.907) 77.212,89.71 79.368,87.554 ; 4.6 v1(116.738,95.907) ; 129.736,87.927 129.362,87.554 79.368,87.554 ; 129.736,91.135 v1(142.309,91.135) 150.164,91.135 6.6 160.423,95.78 163.703,99.06 163.703,115.948 12.6 157.988,121.663 147.32,121.663 11.6
Net1_7: 1.7 2.7 3.7 4.7 5.7 6.7 7.7 8.7 9.7 10.7 11.7 12.7 13.7 14.7 R9.2 | length 366.8
  Top Layer w0.254: 14.7 67.694,123.19 v1(69.748,123.19)
  Top Layer w0.508: 3.7 100.711,91.84 100.711,76.632 104.82,72.523 R9.2
  Bottom Layer w0.254: v1(69.748,123.19) 70.307,123.749 107.134,123.749 110.073,120.81 10.7
  Bottom Layer w0.508: 13.7 50.676,122.047 66.497,122.047 68.199,120.345 68.199,118.745 67.561,118.107 65.659,118.107 14.7 ; 8.7 49.889,62.459 48.155,62.459 7.7 41.402,73.203 62.433,94.234 ; 1.7 61.36,94.234 62.433,94.234 ; 9.7 99.314,121.536 102.286,121.536 103.011,120.81 110.073,120.81 ; 10.7 113.414,120.777 140.84,120.777 11.7 143.891,117.726 145.996,117.726 149.044,120.774 156.337,120.774 12.7 162.814,114.297 162.814,99.949 161.265,98.4 154.889,98.4 6.7 149.675,98.374 139.496,98.374 5.7 134.74,97.434 112.902,97.434 4.7 105.689,90.221 102.33,90.221 3.7 94.005,93.269 77.184,93.269 2.7 73.126,94.234 62.433,94.234
Net1_9: 1.9 2.9 3.9 4.9 5.9 6.9 7.9 8.9 9.9 10.9 11.9 12.9 13.9 14.9 R3.2 | length 335.2
  Top Layer w0.254: 8.9 50.648,69.872 50.648,91.695 1.9
  Top Layer w0.508: 1.9 54.733,115.309 14.9 ; R3.2 127.762,72.523 127.483,72.802 127.483,81.414 131.568,85.499 5.9 ; 6.9 148.209,96.8 148.209,114.678 12.9
  Bottom Layer w0.254: 7.9 54.733,87.623 1.9
  Bottom Layer w0.508: 13.9 46.657,116.408 55.832,116.408 14.9 61.468,117.218 89.916,117.218 9.9 94.764,117.196 104.753,117.196 10.9 109.093,116.71 134.747,116.71 11.9 139.7,116.837 150.368,116.837 12.9 ; 1.9 56.54,97.587 67.786,97.587 2.9 71.704,97.892 89.579,97.892 3.9 93.09,97.434 104.768,97.434 4.9 ; 5.9 133.981,93.113 139.087,93.113 143.281,97.307 145.662,97.307 6.9
Net1_10: 1.10 2.10 3.10 4.10 5.10 6.10 7.10 8.10 9.10 10.10 11.10 12.10 13.10 14.10 R2.2 | length 359.6
  Top Layer w0.254: 8.10 49.86,70.05 49.86,93.447 1.10 ; 4.10 102.362,97.301 102.362,117.345 10.10
  Top Layer w0.508: 13.10 42.548,121.539 54.607,121.539 14.10 52.451,115.567 52.451,103.813 52.193,103.556 1.10 ; 2.10 v1(67.052,98.806) ; 3.10 90.55,97.434 102.228,97.434 102.362,97.301 ; v1(104.14,122.149) 10.10 105.667,120.65 133.347,120.65 11.10 136.325,120.828 148.663,120.828 12.10 146.431,115.44 146.431,97.562 6.10 ; 5.10 129.028,85.508 126.594,83.073 126.594,71.704 127,71.298 131.47,71.298 132.569,72.396 R2.2
  Bottom Layer w0.254: 7.10 53.594,89.024 53.594,94.38 1.10
  Bottom Layer w0.508: 13.10 43.945,122.936 67.73,122.936 71.035,119.631 9.10 92.942,122.784 103.505,122.784 v1(104.14,122.149) ; 1.10 54.126,97.713 54.852,97.713 55.945,98.806 v1(67.052,98.806) ; 5.10 132.479,92.076 140.945,92.076 6.10
Net2_3: 2.3 2.8 Q7.2 | length 20.9
  Top Layer w0.4: Q7.2 71.059,79.467
  Top Layer w0.508: 71.059,79.467 2.3 2.8
Net3_3: 3.3 3.8 Q5.2 | length 21.4
  Top Layer w0.4: Q5.2 91.887,78.451
  Top Layer w0.508: 91.887,78.451 3.3 3.8
Net4_3: 4.3 4.8 Q3.2 | length 29.4
  Top Layer w0.4: 118.684,82.242 Q3.2
  Top Layer w0.508: 4.8 4.3 110.763,78.74 115.182,78.74 118.684,82.242
Net5_3: 5.3 5.8 Q2.2 | length 39.2
  Top Layer w0.4: Q2.2 124.018,87.132
  Top Layer w0.508: 124.018,87.132 123.393,87.757 123.393,95.377 125.679,97.663 131.972,97.663 5.8 5.3
Net6_3: 6.3 6.8 Q1.2 | length 19.7
  Top Layer w0.4: Q1.2 151.069,79.201
  Top Layer w0.508: 6.8 6.3 151.069,79.201
Net7_3: 7.3 7.8 Q13.2 | length 19.5
  Top Layer w0.4: Q13.2 38.801,51.816
  Top Layer w0.508: 38.801,51.816 38.862,51.877 7.3 7.8
Net8_3: 8.3 8.8 Q14.2 | length 38.1
  Top Layer w0.4: 62.677,53.812 Q14.2
  Top Layer w0.508: 8.8 8.3 55.521,52.299 61.163,52.299 62.677,53.812
Net9_3: 9.3 9.8 Q8.2 | length 38.3
  Top Layer w0.254: Q8.2 82.616,117.389 83.312,118.085 93.323,118.085 9.8
  Top Layer w0.508: 9.3 9.8
Net10_3: 10.3 10.8 Q9.2 | length 35.6
  Top Layer w0.4: Q9.2 118.43,118.12
  Top Layer w0.508: 10.3 10.8 ; v1(117.373,119.177) 118.43,118.12
  Bottom Layer w0.508: 10.8 110.744,117.599 115.796,117.599 v1(117.373,119.177)
Net11_3: 11.3 11.8 Q11.2 | length 29.1
  Top Layer w0.4: Q11.2 128.209,108.176 128.588,107.798 136.039,107.798
  Top Layer w0.508: 136.039,107.798 11.3 11.8
Net12_3: 12.3 12.8 Q12.2 | length 26.2
  Top Layer w0.4: 158.988,107.677 Q12.2
  Top Layer w0.508: 12.8 12.3 158.988,107.677
Net13_3: 13.3 13.8 Q4.2 | length 31.5
  Top Layer w0.4: Q4.2 32.918,111.995 37.992,117.069
  Top Layer w0.508: 37.992,117.069 43.158,117.069 13.8 13.3
Net14_3: 14.3 14.8 Q6.2 | length 26.5
  Top Layer w0.4: 64.754,107.55 Q6.2
  Top Layer w0.508: 14.8 14.3 64.754,107.55
NetC1_2: C1.2 IC1.12 Y1.2 | length 17.3
  Top Layer w0.508: IC1.12 147.32,41.659 Y1.2 147.32,33.579 147.701,33.198 C1.2
NetC2_2: C2.2 IC1.13 Y1.1 | length 19
  Top Layer w0.508: IC1.13 152.4,39.119 Y1.1 152.4,33.198 152.654,32.944 C2.2
NetD1_A: D1.A J1.1 | length 6.6
  Top Layer w0.2: J1.1 34.62,34.701
  Top Layer w0.5: 34.62,34.701 37.254,37.335
  Top Layer w0.508: 37.254,37.335 D1.A
NetD1_C: D1.C U1.1 | length 5.7
  Top Layer w0.508: D1.C 47.244,37.335 U1.1
NetD2_C: D2.C P1.2 | length 11.9
  Top Layer w0.508: P1.2 137.487,30.531 139.7,30.531 140.03,30.861 140.03,34.722 137.931,36.821 D2.C
NetIC1_1: IC1.1 R17.1 | length 96.8
  Top Layer w0.508: R17.1 44.958,74.016 v1(46.228,72.746) ; v1(113.157,56.261) 115.062,54.356 IC1.1
  Bottom Layer w0.508: v1(46.228,72.746) 96.672,72.746 v1(113.157,56.261)
NetIC1_2: IC1.2 R16.1 | length 53.4
  Top Layer w0.508: R16.1 77.47,62.154 v1(92.177,47.447)
  Bottom Layer w0.508: v1(92.177,47.447) 116.132,47.447 IC1.2
NetIC1_3: IC1.3 R15.1 | length 41.7
  Top Layer w0.508: R15.1 102.308,66.551 109.865,58.994 114.717,58.994 v1(124.968,48.743)
  Bottom Layer w0.508: IC1.3 122.908,48.743 v1(124.968,48.743)
NetIC1_4: IC1.4 R13.1 | length 136
  Top Layer w0.508: 82.575,88.443 82.575,89.383 81.686,90.272 80.01,90.272 79.35,89.611 79.35,88.443 79.959,87.833 79.959,72.644 107.975,44.628 121.333,44.628 IC1.4 ; 118.948,92.329 R13.1
  Bottom Layer w0.508: 82.575,88.443 127.635,88.443 128.092,88.9 128.092,91.008 126.772,92.329 118.948,92.329
NetIC1_5: IC1.5 R12.1 | length 119.8
  Top Layer w0.508: v1(80.569,89.052) 81.204,88.417 81.204,75.59 98.866,57.928 113.271,57.928 IC1.5 ; R12.1 125.756,92.202 126.517,91.44 v1(126.517,90.145)
  Bottom Layer w0.508: v1(80.569,89.052) 80.848,89.332 125.705,89.332 v1(126.517,90.145)
NetIC1_6: IC1.6 P1.6 pad.5 pad.6 R11.1 | length 62.9
  Top Layer w0.254: pad.6@130.68,56.766 pad.6 ; v1(154.399,71.501) 156.809,73.911 R11.1
  Top Layer w0.508: P1.6 125.984,44.199 IC1.6 ; pad.5 pad.6@130.68,56.766
  Bottom Layer w0.254: 143.235,57.023 146.801,60.59 146.801,63.904 v1(154.399,71.501)
  Bottom Layer w0.508: IC1.6 pad.5 ; pad.6 143.235,57.023
NetIC1_7: IC1.7 P1.5 R7.1 | length 174.6
  Top Layer w0.254: R7.1 39.528,102.229 46.812,94.945 46.812,73.965 47.625,73.152 47.625,72.238 46.482,71.095 46.482,41.58 v1(46.812,41.25)
  Top Layer w0.508: P1.5 128.524,44.199 IC1.7
  Bottom Layer w0.254: v1(46.812,41.25) 46.812,37.579 54.826,29.566 126.216,29.566 P1.5
NetIC1_8: IC1.8 P1.4 R10.1 | length 137.1
  Top Layer w0.508: R10.1 73.343,117.218 72.568,116.443 72.568,106.998 71.628,106.058 71.628,101.473 73.66,99.441 77.47,99.441 78.791,98.12 78.791,91.491 78.461,91.161 78.461,87.274 78.791,86.944 78.791,72.21 120.47,30.531 129.721,30.531 P1.4 131.064,44.199 IC1.8
NetIC1_9: IC1.9 P1.3 | length 14.8
  Top Layer w0.508: P1.3 135.382,33.652 IC1.9
NetIC1_18: IC1.18 R24.1 | length 97
  Top Layer w0.508: R24.1 76.082,59.046 91.374,43.754
  Bottom Layer w0.508: 91.374,43.754 156.019,43.754 IC1.18
NetIC1_19: IC1.19 R22.1 | length 123.3
  Top Layer w0.508: v1(48.108,44.171) 48.108,47.114 R22.1
  Bottom Layer w0.508: v1(48.108,44.171) 50.013,42.266 54.61,42.266 61.001,35.874 86.09,35.874 93.066,42.85 157.655,42.85 IC1.19
NetIC1_20: IC1.20 R20.1 | length 54.2
  Top Layer w0.254: IC1.20 168.593,51.248 168.593,74.942 168.148,75.387 R20.1
NetIC1_21: IC1.21 R19.1 | length 125
  Top Layer w0.254: v1(117.373,85.014) 117.373,93.497 118.313,94.437 118.313,106.807 118.872,107.366 122.555,107.366 128.194,113.005 128.194,118.865 128.588,119.259 R19.1
  Bottom Layer w0.254: v1(117.373,85.014) 168.021,85.014 173.05,79.985 173.05,67.208 167.059,61.217 IC1.21
NetIC1_22: IC1.22 P2.4 P3.4 R27.2 | length 15.8
  Top Layer w0.508: IC1.22 160.782,62.789 161.036,63.043 R27.2 162.563,64.643 P3.4
  Bottom Layer w0.508: P3.4 168.961,68.45 169.088,68.323 P2.4
NetIC1_23: IC1.23 P2.3 P3.3 R28.2 | length 30.2
  Top Layer w0.508: R28.2 158.064,67.443 161.611,70.99 P3.3
  Bottom Layer w0.508: IC1.23 158.242,62.862 P3.3 168.961,70.99 169.088,70.863 P2.3
NetIC1_24: IC1.24 R21.1 S1.1 | length 107.7
  Top Layer w0.508: R21.1 66.675,36.395 S1.1 72.415,33.703 72.415,38.732 73.889,40.205 76.355,40.205 76.784,39.776 v1(79.807,39.776)
  Bottom Layer w0.508: v1(79.807,39.776) 90.449,50.419 144.904,50.419 IC1.24
NetIC1_25: IC1.25 R23.1 S2.1 | length 104.7
  Top Layer w0.508: v1(73.889,37.109) 75.867,37.109 78.105,34.871 ; R23.1 78.105,34.871 ; S2.1 78.105,34.871
  Bottom Layer w0.508: v1(73.889,37.109) 73.889,41.91 83.287,51.308 143.253,51.308 IC1.25
NetIC1_26: IC1.26 R25.1 S3.1 | length 136.2
  Top Layer w0.508: 64.948,38.837 64.948,31.75 66.472,30.226 89.259,30.226 S3.1 88.392,34.998 R25.1
  Bottom Layer w0.508: 64.948,38.837 78.308,52.197 141.602,52.197 IC1.26
NetIC1_27: IC1.27 R26.1 S4.1 | length 87.9
  Top Layer w0.508: v1(95.352,53.442) 103.149,45.644 103.149,33.703 S4.1 98.806,34.998 R26.1
  Bottom Layer w0.508: v1(95.352,53.442) 140.911,53.442 147.563,60.094 147.563,60.698 IC1.27
NetIC1_28: IC1.28 R18.1 | length 69.7
  Top Layer w0.254: R18.1 121.606,119.262 v1(126.187,114.681) ; v1(134.798,102.159) 140.945,96.012 140.945,94.285 143.535,91.694 143.535,89.383 143.104,88.951 143.104,75.768 v1(145.542,73.33)
  Bottom Layer w0.254: v1(126.187,114.681) 126.187,110.284 134.312,102.159 v1(134.798,102.159) ; IC1.28 v1(145.542,73.33)
NetIC1_29: IC1.29 R14.1 | length 107.7
  Top Layer w0.508: R14.1 85.344,116.97 85.649,116.665 85.649,87.452 84.194,85.998 84.194,77.782 v1(87.071,74.905)
  Bottom Layer w0.508: v1(87.071,74.905) 98.603,74.905 113.625,59.883 141.668,59.883 IC1.29
NetIC1_33: IC1.33 R1.1 | length 10.3
  Top Layer w0.508: IC1.33 132.842,64.897 R1.1
NetIC1_34: IC1.34 R2.1 | length 10.3
  Top Layer w0.254: IC1.34 130.302,68.072 131.826,69.596 R2.1
NetIC1_35: IC1.35 R3.1 | length 8.9
  Top Layer w0.508: IC1.35 128.778,62.233 R3.1
NetIC1_36: IC1.36 R4.1 | length 8.7
  Top Layer w0.508: R4.1 124.841,65.481 125.222,65.1 IC1.36
NetIC1_37: IC1.37 R5.1 | length 9.2
  Top Layer w0.508: R5.1 121.031,62.868 IC1.37
NetIC1_38: IC1.38 R6.1 | length 9.6
  Top Layer w0.508: R6.1 117.475,63.884 IC1.38
NetIC1_39: IC1.39 R8.1 | length 10.1
  Top Layer w0.508: R8.1 113.792,65.027 IC1.39
NetIC1_40: IC1.40 R9.1 | length 10.8
  Top Layer w0.508: R9.1 109.601,66.678 IC1.40
NetJ1_5: J1.5 J1.S U1.2 | length 38.4
  Top Layer w0.2: J1.5 33.334,31.301 J1.S@33.659,30.976
  Top Layer w0.254: J1.S@30.659,34.551 30.659,35.56 30.925,35.826 33.659,35.826 32.571,36.914 J1.S@30.659,36.914
  Top Layer w0.508: J1.S@30.659,29.888 J1.S@30.659,32.251 ; J1.S@30.659,34.551 J1.S@30.659,32.251 ; J1.5 32.052,32.101 31.902,32.251 J1.S@30.659,32.251
  Bottom Layer w0.508: J1.S@33.659,35.826 40.302,42.469 47.828,42.469 50.927,39.37 U1.2
NetQ1_1: Q1.1 R11.2 | length 4.8
  Top Layer w0.508: Q1.1 155.296,76.646 155.361,76.711 R11.2
NetQ2_1: Q2.1 R12.2 | length 5.7
  Top Layer w0.4: Q2.1 125.918,87.288
  Top Layer w0.508: R12.2 124.714,88.492 125.918,87.288
NetQ3_1: Q3.1 R13.2 | length 5.2
  Top Layer w0.508: R13.2 120.523,86.929 120.584,86.868 Q3.1
NetQ4_1: Q4.1 R7.2 | length 7
  Top Layer w0.4: R7.2 34.417,107.315 Q4.1
NetQ5_1: Q5.1 R15.2 | length 8.1
  Top Layer w0.4: 93.787,70.739 Q5.1
  Top Layer w0.508: 93.787,70.739 95.175,69.351 R15.2
NetQ6_1: Q6.1 R10.2 | length 7.2
  Top Layer w0.508: Q6.1 73.467,110.566 74.295,111.394 R10.2
NetQ7_1: Q7.1 R16.2 | length 7.6
  Top Layer w0.4: Q7.1 76.2,75.292
  Top Layer w0.508: 76.2,75.292 77.47,74.022 R16.2
NetQ8_1: Q8.1 R14.2 | length 6.7
  Top Layer w0.508: R14.2 84.328,110.932 84.516,110.744 Q8.1
NetQ9_1: Q9.1 R18.2 | length 7.8
  Top Layer w0.4: Q9.1 120.33,112.471
  Top Layer w0.508: 120.33,112.471 120.523,112.664 R18.2
NetQ10_1: Q10.1 R17.2 | length 3.9
  Top Layer w0.508: Q10.1 42.697,87.992 43.694,86.995 R17.2
NetQ11_1: Q11.1 R19.2 | length 7.9
  Top Layer w0.254: R19.2 129.794,112.888 130.109,112.573 Q11.1
NetQ12_1: Q12.1 R20.2 | length 7.7
  Top Layer w0.4: 166.685,104.841 Q12.1
  Top Layer w0.508: 166.685,104.841 168.148,103.378 R20.2
NetQ13_1: Q13.1 R22.2 | length 6.6
  Top Layer w0.4: 40.701,48.26 Q13.1
  Top Layer w0.508: 40.701,48.26 41.847,47.114 R22.2
NetQ14_1: Q14.1 R24.2 | length 7.6
  Top Layer w0.4: 64.577,63.741 Q14.1
  Top Layer w0.508: 64.577,63.741 66.472,61.846 R24.2
pads on no net: IC1.14 IC1.15 IC1.16 IC1.17 J1.2 J1.3 J1.4 S1.2 S1.4 S2.2 S2.4 S3.2 S3.4 S4.2 S4.4
copper on no net: | length 989.4
  Top Layer w0.508: 27.455,29.185 27.455,38.227 27.555,38.327 27.555,124.733 176.272,124.733 176.272,26.181 176.056,25.965 152.102,25.965 151.886,26.181 27.555,26.181 27.555,29.085 27.455,29.185
  Bottom Layer w0.254: 27.432,29.21 27.432,38.354 27.559,38.481 27.559,124.714 176.276,124.714 176.276,26.162 27.559,26.162 27.559,29.083 27.432,29.21

## Polygon pours and split planes (outlines as drawn)
no net on Top Layer "Top Layer-No Net" (solid, pour order 0): 27.555,124.733 27.555,26.311 176.272,26.311 176.022,26.562 176.022,124.733
GND on Bottom Layer "Top Layer-No Net" (solid, pour order 2): 27.559,124.714 27.559,26.67 28.067,26.162 175.387,26.162 175.387,124.46 175.641,124.714

## Other copper
Top Layer:
  text "ECE6M2019 1604081064" at 173.609,90.805 h1.52 r90
  text "Yatin Khurana" at 173.101,28.956 h1.52 r90
  text "RTC Clock" at 38.227,28.448 h1.52

## Text inside footprints (layer, text, board x,y; h text height)
U1: Top Overlay "3" at 52.967,34.653 h1.5; Top Overlay "1" at 48.137,34.653 h1.5; Top Overlay "2" at 50.427,34.653 h1.5